# Altium PCB IR_robottino_encoders2.PcbDoc
Units mm, origin at the board's own origin, x right, y up, seen from the top; angles counter-clockwise.
Board outline 9 x 14 mm, 4 copper layers (Top Layer, Internal Plane 1, Internal Plane 2, Bottom Layer); 4 components, 4 nets, 13 pads, 0 vias.
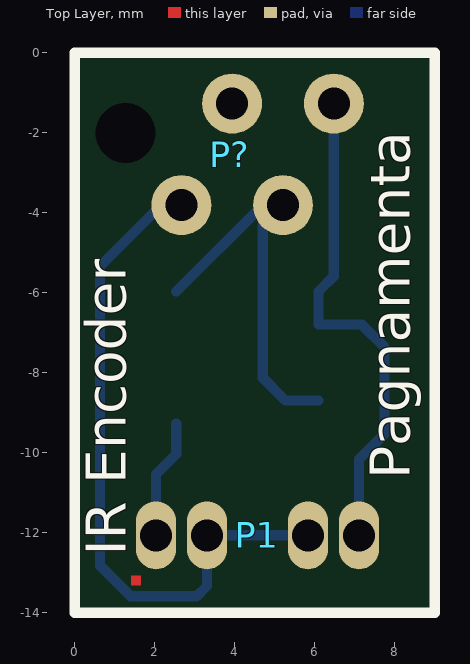
[diagram p0: Top Layer view]
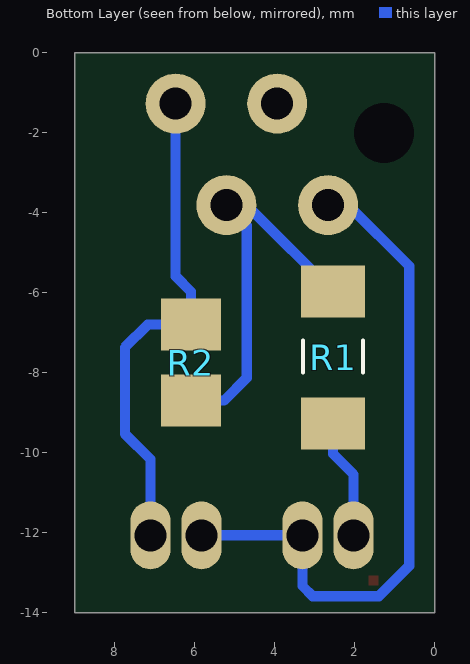
[diagram p1: Bottom Layer view, seen from below]
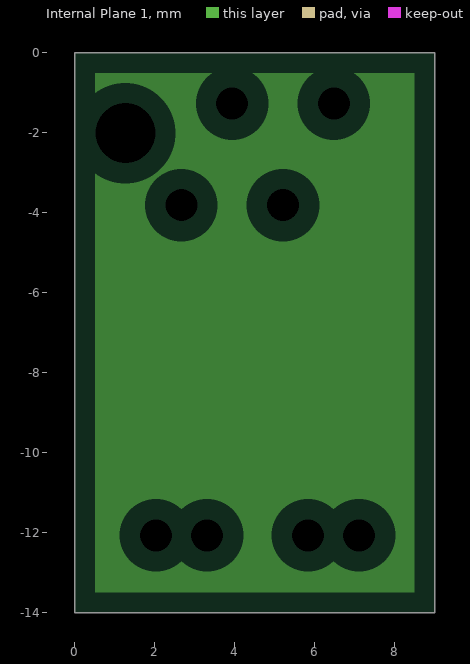
[diagram p2: Internal Plane 1, clearances drawn from the general rule]
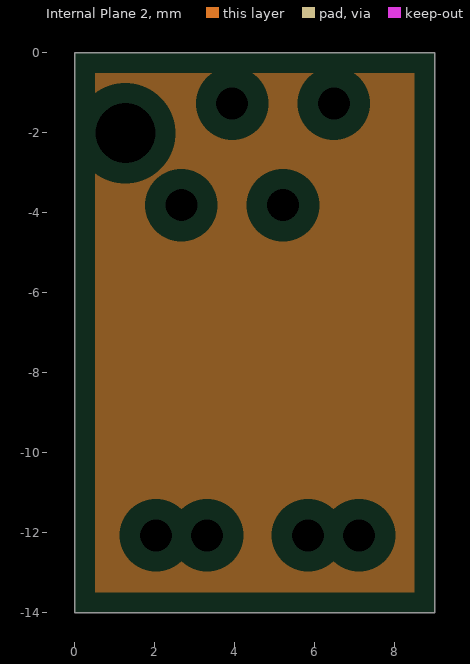
[diagram p3: Internal Plane 2, clearances drawn from the general rule]

## Layer stack, top to bottom
Top Layer: signal copper 0.0356
Dielectric: dielectric 0.32, FR-4, Dk 4.8
Internal Plane 1: plane copper 0.0356
Dielectric: dielectric 0.32, FR-4, Dk 4.8
Internal Plane 2: plane copper 0.0356
Dielectric: dielectric 0.32, FR-4, Dk 4.8
Bottom Layer: signal copper 0.0356

## Board outline
0,-14 9,-14 9,0 0,0

## Design rules (kind name [scope] priority, off if disabled: settings)
Clearance [All] p1: gap=0.15
PlaneClearance [All] p1: clearance=0.508
PlaneConnect [All] p1: planeconnectstyle=Direct reliefexpansion=0.508 reliefentries=4 reliefconductorwidth=0.254 reliefairgap=0.254
PolygonConnect PolygonConnect_nettie [InComponent('nt1') vs InNet('GND')] p1: connectstyle=Direct reliefconductorwidth=0.254 reliefentries=4 polygonreliefangle="90 Angle"
PolygonConnect PolygonConnect_pad [InComponent('U3') vs InNet('GND')] p2: connectstyle=Direct reliefconductorwidth=0.254 reliefentries=4 polygonreliefangle="90 Angle"
PolygonConnect [All] p3: connectstyle=Relief reliefconductorwidth=0.254 reliefentries=4 polygonreliefangle="90 Angle"
RoutingVias [All] p1: holewidth=0.35 width=0.6 viastyle="Through Hole" minholewidth=0.2 minwidth=0.4 maxholewidth=1.2 maxwidth=1
SilkscreenOverComponentPads [All] p1: minsilkscreentomaskgap=0.254
SolderMaskExpansion SolderMaskExpansion_via [IsVia] p1: expansion=-0.5
SolderMaskExpansion [All] p2: expansion=0.102
Width [All] p1: maxlimit=1 minlimit=0.203 preferedwidth=0.203
25 further rules are at their usual default settings.

## Components (designator, comment, footprint, x,y, rotation, side; value= is the part's Value field where it differs from the comment)
P1 "Header 2" "TCRT 1000" 2.032,-12.065 r0 top
P? "I2C" TYCO/215079-4 2.667,-3.81 r180 top
R1 "75ohm" R/1206 2.54,-7.62 r270 bottom
R2 "15kOhm" R/0805 6.096,-7.747 r90 bottom

## Footprints (in the part's own frame and the unit in brackets; to place one, negate y for a bottom-side part, rotate by r counter-clockwise, add the part's x,y. Pads: shape width x height; smd on the part's side, far side on the other; paste and mask are expansions set on the pad)
R/0805 [mm] "Chip Resistor; Body 2.0 x 1.3 mm (LxW typ)"
  rect 1.3x1.5 smd: 1(-0.95,0) 2(0.95,0)
  body extent -1,-0.62 1,0.63, height 0.78
R/1206 [mm] "Chip Resistor, Body 3.2x1.6mm, IPC Low Density"
  rect 1.3x1.6 smd: 1(-1.651,0) 2(1.651,0)
  silkscreen extent -0.43,-0.75 0.38,0.75, body extent -1.6,-0.8 1.6,0.8, height 1
"TCRT 1000" [mm]
  oval 1x1.7 hole 0.8: 1(0,0) 2(1.275,0) 3(3.8,0) 4(5.075,0)
  Top Layer region: -0.625,-1.25 -0.375,-1.25 -0.375,-1 -0.625,-1
TYCO/215079-4 [mm]
  round 1.5 hole 0.8: 1(0,0) 2(-1.27,-2.54) 3(-2.54,0) 4(-3.81,-2.54)
  round 1.3 hole 1.5 unplated: 5(1.4,-1.8)
  body extent -5.41,-3.74 1.6,1.26, height 4

## Part data
P1: library part "TCRT 1000", "Header, 2-Pin"
P?: library part Micromatch-I2C, "Micromatch I2C Connector"
R1 R2: library part R, "Resistor"

## Nets (pads, with @x,y where several pads share a name; then routed paths per layer and width w, separated by ;. In a path a pad name is that pad's centre, name@x,y a point inside that pad or via, vN(x,y) a via of type N, cw(c..) or ccw(c..) an arc to the next point about the centre after c; other vN are vias at no path point)
DATA: P1.4 P?.4 R2.2 | length 12.5
  Bottom Layer w0.254: P?.4 6.477,-5.588 6.096,-5.969 R2.2 7.178,-6.797 7.747,-7.366 7.747,-9.525 7.107,-10.165 P1.4
GND: P1.2 P1.3 P?.1 | length 17
  Bottom Layer w0.254: P?.1 2.159,-3.81 0.635,-5.334 0.635,-12.827 1.397,-13.589 3.048,-13.589 3.307,-13.33 P1.2 P1.3
NetP1_1: P1.1 R1.2 | length 3
  Bottom Layer w0.254: P1.1 2.032,-10.541 2.54,-10.033 R1.2
NetP?_3: P?.3 R1.1 R2.1 | length 9.5
  Bottom Layer w0.254: R1.1 4.572,-3.937 P?.3@5.08,-3.937 ; P?.3 P?.3@5.08,-3.937 ; R2.1 5.268,-8.697 4.699,-8.128 4.699,-4.318 P?.3@5.08,-3.937
pads on no net: P?.2 P?.5

## Polygon pours and split planes (outlines as drawn)
no net on Internal Plane 1 (split plane): 8.49,-13.49 0.51,-13.49 0.51,-0.51 8.49,-0.51
no net on Internal Plane 2 (split plane): 8.49,-13.49 0.51,-13.49 0.51,-0.51 8.49,-0.51

## Silkscreen, mask and mechanical layers (free items; w line width, h text height)
Top Overlay:
  the board outline again, w0.254
  text "Pagnamenta" at 8.382,-10.668 h1 r90
  text "IR Encoder" at 1.27,-12.573 h1 r90